# Altium PCB Dual_Holding_Dongle_1_sided.PcbDoc
Units mil, origin at the board's own origin, x right, y up, seen from the top; angles counter-clockwise.
Board outline 826.77 x 1181.1 mil, 2 copper layers (Top Layer, Bottom Layer), stack 61.811 mil thick; 49 components, 36 nets, 196 pads, 133 vias.
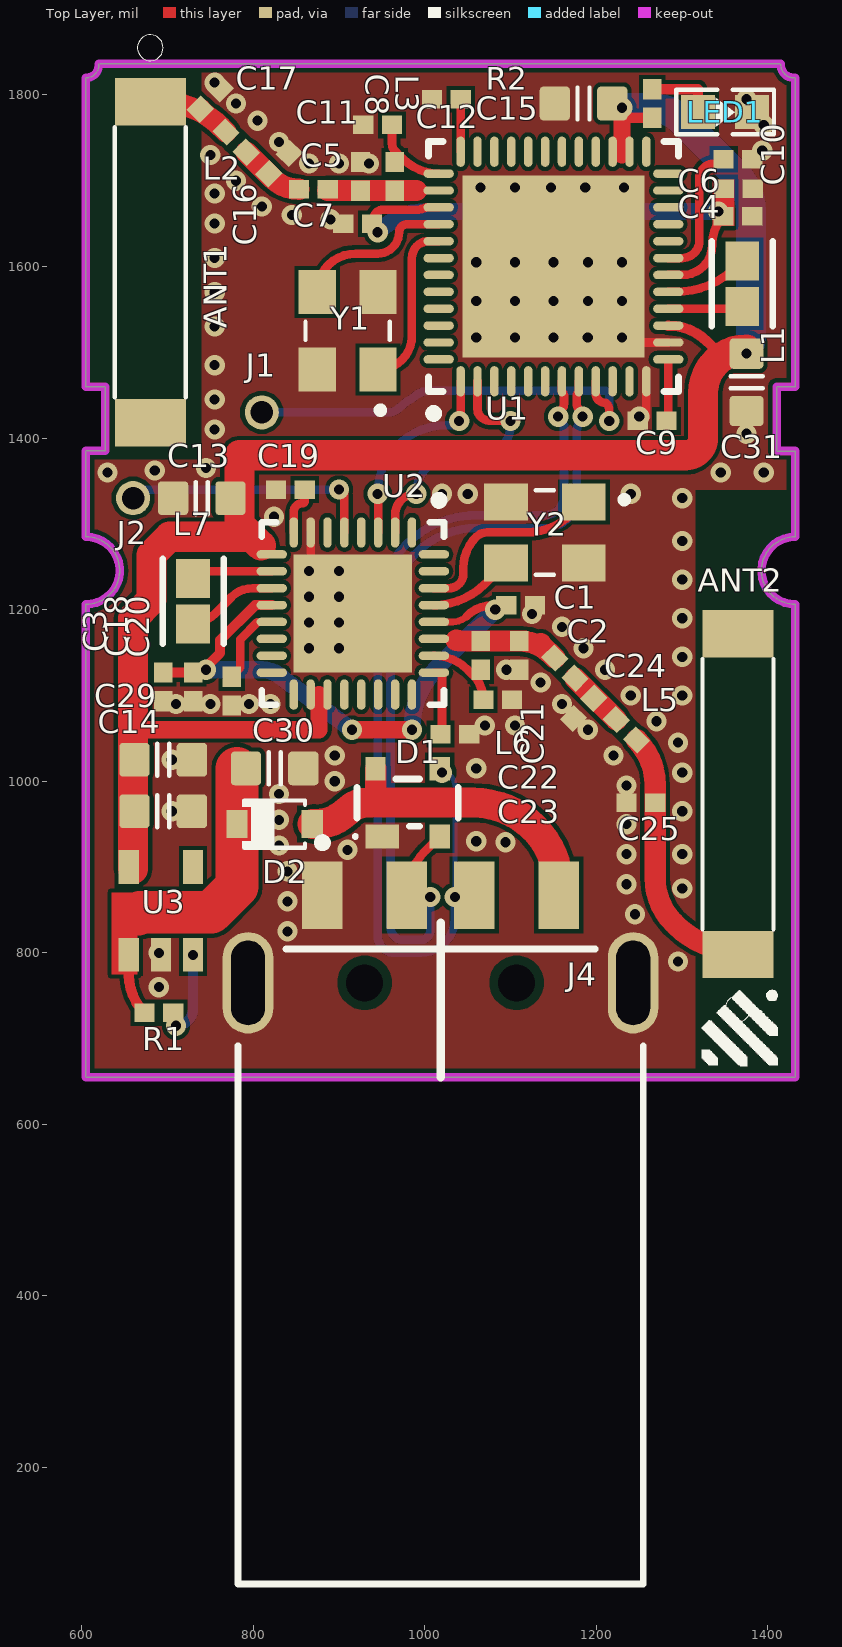
[diagram p0: Top Layer view]
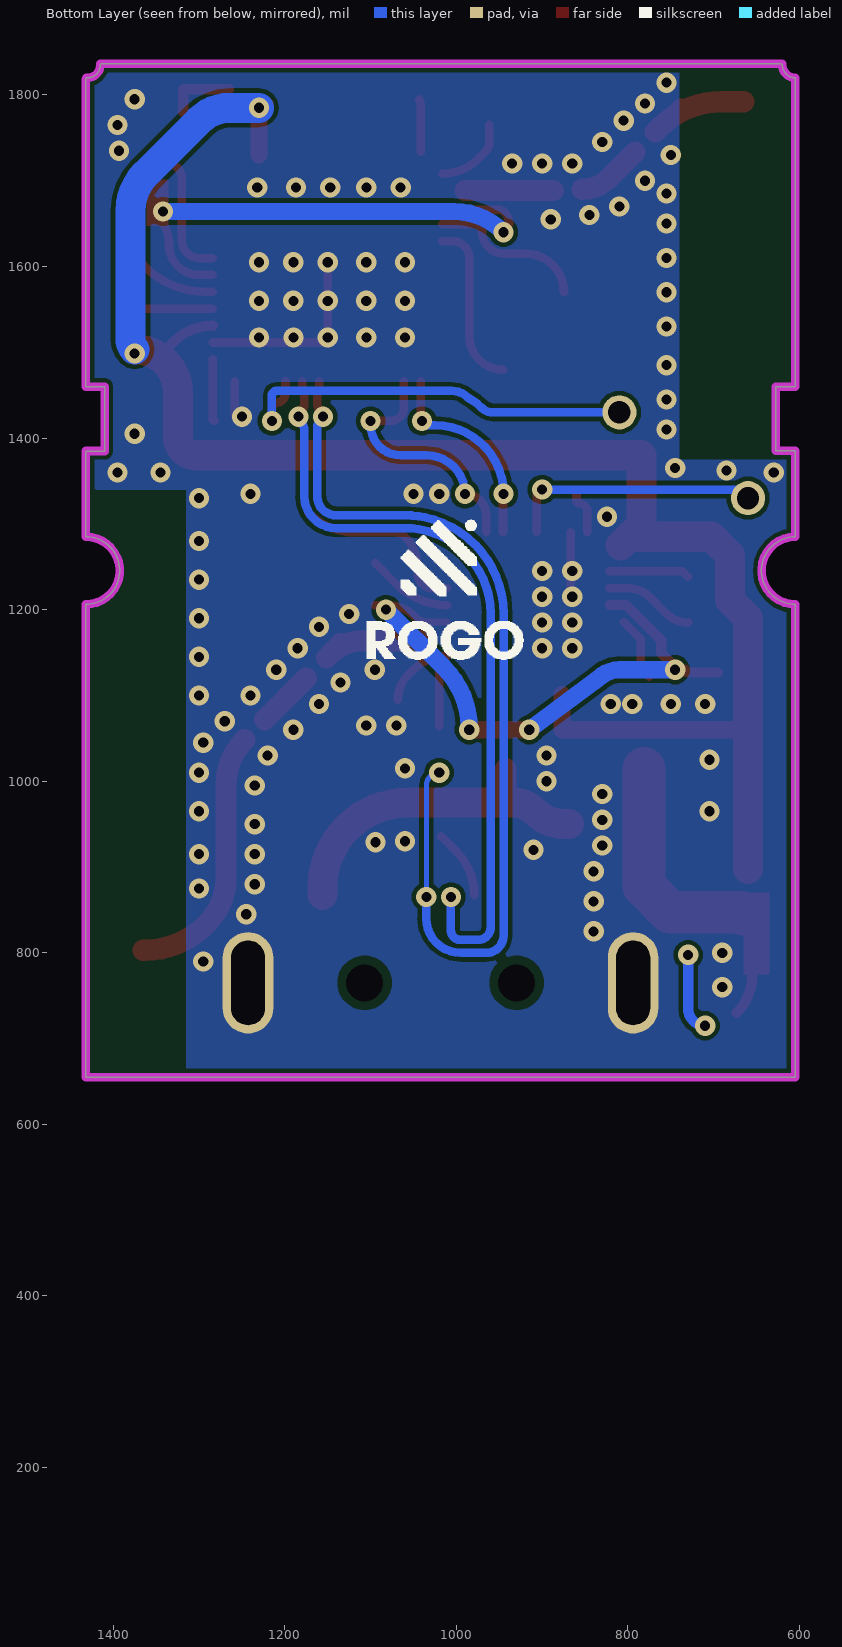
[diagram p1: Bottom Layer view, seen from below]
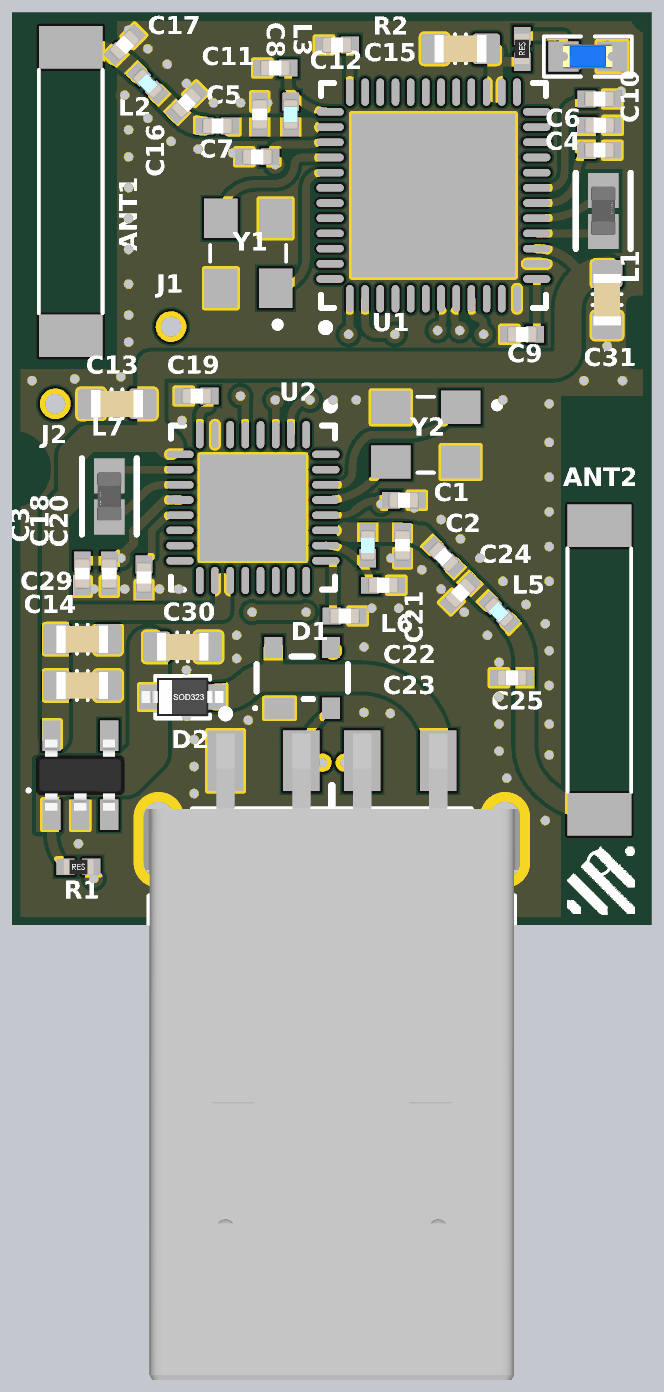
[diagram p2: 3D render of the assembled board from above, using the file's embedded part models]

## Layer stack, top to bottom
Top Solder: solder mask 0.5, Solder Resist, Dk 3.8
Top Layer: signal copper 1.378
Dielectric: core 59.0551, FR-4, Dk 4.5
Bottom Layer: signal copper 1.378
Bottom Solder: solder mask 0.5, Solder Resist, Dk 3.8

## Board outline
605,655 605,1206.18 ccw(c605,1245.55) 605,1284.92 605,1385 627.5,1385 627.5,1460 605,1460 605,1820 ccw(c605,1835) 619.97,1836.02 621.1,1836.1 1413.9,1836.1 1415.04,1836.02 ccw(c1430,1835) 1431.58,1820.08 1431.77,1818.23 1431.77,1459.92 1410,1459.92 1410,1384.92 1431.77,1384.92 1431.77,1284.92 ccw(c1431.77,1245.55) 1431.77,1206.18 1431.77,655

## Design rules (kind name [scope] priority, off if disabled: settings)
BoardOutlineClearance [All] p1: gap=7.87 ignorepadtopadclearanceinfootprint=FALSE
Clearance [All] p1: gap=5 ignorepadtopadclearanceinfootprint=FALSE except(9.84: Arc-Hole Track-Hole SMDPad-Hole THPad-Hole Via-Hole Fill-Hole Poly-Hole Region-Hole Text-Hole)
ComponentClearance [All] p1: gap=5 collisioncheckmode=3 verticalgap=5 showdistances=TRUE
DiffPairsRouting [All] p1: maxlimit=10 minlimit=5 mostfreqgap=5 toplayer_minwidth=5 toplayer_maxwidth=1000 toplayer_prefwidth=5 bottomlayer_minwidth=5 bottomlayer_maxwidth=1000 bottomlayer_prefwidth=5 maxuncoupledlength=500
Height [All] p1: minheight=0 maxheight=71497.94 prefheight=500
HoleSize [All] p1: absolutevalues=TRUE maxlimit=248.03 minlimit=11.81 maxpercent=80.000 minpercent=20.000
HoleToHoleClearance [All] p1: gap=9.84 allowstackedmicrovias=FALSE
MinimumAnnularRing [All] p1: minimumring=3
MinimumSolderMaskSliver [All] p1: minsoldermaskwidth=0
PlaneClearance [All] p1: clearance=5
PlaneConnect PlaneConnectPowerPads [InPadClass('PowerPads')] p1: planeconnectstyle=Direct reliefexpansion=20 reliefentries=4 reliefconductorwidth=10 reliefairgap=10
PlaneConnect [All] p2: pad.planeconnectstyle=Relief pad.reliefexpansion=11.81 pad.reliefentries=4 pad.reliefconductorwidth=5 pad.reliefairgap=5 via.planeconnectstyle=Direct via.reliefexpansion=11.81 via.reliefentries=4 via.reliefconductorwidth=5 via.reliefairgap=5
PolygonConnect PolygonConnectPowerPads [All vs (InPadClass('PowerPads'))] p1: connectstyle=Direct reliefconductorwidth=10 reliefentries=4 polygonreliefangle="90 Angle" airgapwidth=10
PolygonConnect [All] p2: connectstyle=Direct reliefconductorwidth=5 reliefentries=4 polygonreliefangle="90 Angle" airgapwidth=5
RoutingVias [All] p1: holewidth=11.81 width=23.62 viastyle="Through Hole" minholewidth=11.81 minwidth=23.62 maxholewidth=23.62 maxwidth=259.84
SilkToSilkClearance [All] p1: silktosilkclearance=0
SilkToSolderMaskClearance [IsPad] p1: minsilkscreentomaskgap=5 clearancetoexposedcopper=TRUE
SolderMaskExpansion [All] p1: expansion=2.95 istentingtop=FALSE
Width RF [InNetClass('RF')] p1: maxlimit=24.88 minlimit=24.88 preferedwidth=24.88 impedanceprofiledriven=TRUE impedanceprofileid={C07CD429-3416-41F3-9311-E252DA83A641} impedanceprofilevalue=50.000000 minimp=50.000000 maximp=50.000000 favimp=50.000000
Width [All] p2: maxlimit=1000 minlimit=5 preferedwidth=5 minimp=50.000000 maximp=50.000000 favimp=50.000000
20 further rules are at their usual default settings.

## Classes and differential pairs
net class RF: NetANT1_1 NetANT2_1 NetC2_1 NetC2_2 NetC5_1 NetC5_2
differential pair D: +D_P -D_N

## Components (designator, comment, footprint, x,y, rotation, side; value= is the part's Value field where it differs from the comment)
ANT1 "ANT_Rainsun" ANT2-SMD-9.5X2.1X1.0MM 680,1605 r270 top
ANT2 "ANT_Rainsun" ANT2-SMD-9.5X2.1X1.0MM 1365,985 r90 top
C1 "2.2uF" CAP0402 1111.73,1205 r0 top
C2 "220pF" CAP0402 1163.17,1131.83 r315 top
C3 "104" CAP0402 695,1110 r270 top
C4 "2.2uF" CAP0402 1365,1658.69 r0 top
C5 "220pF" CAP0402 870,1690 r180 top
C6 "104" CAP0402 1365.41,1690.87 r0 top
C7 "2.2uF" CAP0402 921.73,1650 r180 top
C8 "2.7pF" CAP0402 925,1705 r90 top
C9 "1UF" CAP0402 1265,1420 r180 top
C10 "1UF" CAP0402 1365,1725 r0 top
C11 "18pF" CAP0402 945,1765 r0 top
C12 "1UF" CAP0402 1025,1795 r180 top
C13 "1UF" CAPC1608X90N 740,1330 r180 top
C14 "1UF" CAPC1608X90N 695,965 r0 top
C15 "1UF" CAPC1608X90N 1185,1790 r180 top
C16 "2pF" CAP0402 830,1720 r45 top
C17 "2pF" CAP0402 750,1795 r45 top
C18 "2.2uF" CAP0402 730,1110 r270 top
C19 "1UF" CAP0402 843.27,1340 r180 top
C20 "1UF" CAP0402 775,1105 r270 top
C21 "2.7pF" CAP0402 1110,1146.73 r270 top
C22 "18pF" CAP0402 1085,1095 r180 top
C23 "1UF" CAP0402 1035,1055 r0 top
C24 "2pF" CAP0402 1185,1085 r225 top
C25 "2pF" CAP0402 1251.73,975 r180 top
C29 "10uF" CAPC1608X90N 695,1025 r0 top
C30 "10uF" CAPC1608X90N 825,1015 r0 top
C31 "10uF" CAPC1608X90N 1375,1465 r270 top
D1 "PRTR5V0U2X,215" NXP-SOT143B-4_V 980,975 r90 top
D2 "1N5819/SS14/S4(SOD_323)" SMT_DIODE_SOD_323 825,950 r180 top
J1 "TEST_POINT" TEST_POINT_HOLE_SMALL 810,1430 r0 top
J2 "TEST_POINT" TEST_POINT_HOLE_SMALL 660,1330 r90 top
J4 "480-37-1000" MOLX-480-37-1000_V 1018.39,816.18 r0 top locked
L1 "LBMF1608T470M" FP-LBMF1608-0_8-0_2-IPC_B 1370,1580 r90 top
L2 "3.3nH" IND0402 780,1745 r135 top value="150 mH"
L3 "1.3nF" IND0402 965,1705 r270 top value="150 mH"
L5 "3.3nH" IND0402 1235,1060 r315 top value="150 mH"
L6 "1.3nF" IND0402 1065,1146.73 r90 top value="150 mH"
L7 "LBMF1608T470M" FP-LBMF1608-0_8-0_2-IPC_B 730,1210 r270 top
LED1 "BLUE" SMT_LED_0603 1350,1780 r0 top
R1 "Resistor" RES0402 690,730 r0 top value=100K
R2 "Resistor" RES0402 1265,1790 r90 top value=100K
U1 "Telink TLSR8251F512ET48" QFN50P700X700X80_HS-49N 1150,1600 r90 top locked
U2 "Telink TLSR8251F512ET32" QFN50P500X500X80_HS-33N2 916.1,1195.51 r270 top
U3 "AP2112K-3.3TRG1" SOT23-5 692.4,797.64 r0 top
Y1 "ECS-240-10-33-AGM-TR" XTAL_ECS-240-10-33-AGM-TR 910,1525 r90 top
Y2 "ECS-240-10-33-AGM-TR" XTAL_ECS-240-10-33-AGM-TR 1140,1290 r180 top

## Footprints (in the part's own frame and the unit in brackets; to place one, negate y for a bottom-side part, rotate by r counter-clockwise, add the part's x,y. Pads: shape width x height; smd on the part's side, far side on the other; paste and mask are expansions set on the pad)
ANT2-SMD-9.5X2.1X1.0MM [mm]
  rect 1.4x2.1 smd: 1(-4.75,0) 2(4.75,0)
  silkscreen extent -6.73,-1.05 4,1.05
CAP0402 [mm] "0402 foorprint SMT"
  rect 0.6x0.55 smd: 1(-0.425,0) 2(0.425,0)
  body extent -0.5,-0.26 0.5,0.26, height 0.57
CAPC1608X90N [mm] "Chip Capacitor, Body 1.6x0.8mm, EIA 0603, IPC Medium Density"
  round 0.254 on Mech15: 0(0,0)
  rrect25% 0.9x1 smd: 1(-0.85,0) 2(0.85,0)
  silkscreen extent -0.18,-0.48 0.18,0.48, body extent -0.85,-0.45 0.85,0.45, height 0.89
FP-LBMF1608-0_8-0_2-IPC_B [mil]
  rect 45.48x39.61 smd paste+0 mask+0: 1(-26.59,0) 2(26.59,0)
  silkscreen extent -49,-36 49,36, body extent -59,-30 59,30, height 10
IND0402 [mm] "0402 foorprint SMT"
  rect 0.6x0.55 smd: 1(-0.425,0) 2(0.425,0)
  body extent -0.5,-0.25 0.5,0.25, height 0.5
MOLX-480-37-1000_V [mm] "CONN, 4-Leads, Body 12x18.8mm"
  rect 1.2x2 smd: 1(-3.5,1.3) 2(-1,1.3) 3(1,1.3) 4(3.5,1.3)
  oval 1.5x3 hole 1 slot 2.5 at 90 deg: 5(-5.7,-1.3) 6(5.7,-1.3)
  round 0.5 hole 1.1 unplated: MH1(-2.25,-1.3) MH2(2.25,-1.3)
  silkscreen extent -6,-19.1 6,2.97, body extent -6.35,-19.08 6.35,2.2, height 3.07
NXP-SOT143B-4_V [mm] "SOT143, 4-Leads, Body 3x1.4mm"
  rect 0.7x1 smd: 1(-1,0.75)
  rect 0.7x0.6 smd: 2(-1,-0.95) 3(1,-0.95) 4(1,0.95)
  silkscreen extent -1.05,-1.5 0.7,1.6, body extent -0.7,-1.5 0.7,1.5, height 1.1
QFN50P500X500X80_HS-33N2 [mm] "QFN, 32-Leads, Body 5.00x5.00mm, Pitch 0.50mm, Thermal Pad 3.50x3.50mm, IPC Medium Density"
  oval 0.9x0.25 smd: 1(-2.4,1.75) 2(-2.4,1.25) 3(-2.4,0.75) 4(-2.4,0.25) 5(-2.4,-0.25) 6(-2.4,-0.75) 7(-2.4,-1.25) 8(-2.4,-1.75) 17(2.4,-1.75) 18(2.4,-1.25) 19(2.4,-0.75) 20(2.4,-0.25) 21(2.4,0.25) 22(2.4,0.75) 23(2.4,1.25) 24(2.4,1.75)
  oval 0.25x0.9 smd: 9(-1.75,-2.4) 10(-1.25,-2.4) 11(-0.75,-2.4) 12(-0.25,-2.4) 13(0.25,-2.4) 14(0.75,-2.4) 15(1.25,-2.4) 16(1.75,-2.4) 25(1.75,2.4) 26(1.25,2.4) 27(0.75,2.4) 28(0.25,2.4) 29(-0.25,2.4) 30(-0.75,2.4) 31(-1.25,2.4) 32(-1.75,2.4)
  rect 3.5x3.5 smd: 33(0,0)
  silkscreen extent -3.47,-2.7 2.7,2.7, body extent -2.55,-2.55 2.55,2.55, height 0.8
QFN50P700X700X80_HS-49N [mm] "QFN, 48-Leads, Body 7.00x7.00mm, Pitch 0.50mm, Thermal Pad 5.40x5.40mm, IPC Medium Density"
  oval 0.9x0.25 smd: 1(-3.4,2.75) 2(-3.4,2.25) 3(-3.4,1.75) 4(-3.4,1.25) 5(-3.4,0.75) 6(-3.4,0.25) 7(-3.4,-0.25) 8(-3.4,-0.75) 9(-3.4,-1.25) 10(-3.4,-1.75) 11(-3.4,-2.25) 12(-3.4,-2.75) 25(3.4,-2.75) 26(3.4,-2.25) 27(3.4,-1.75) 28(3.4,-1.25) 29(3.4,-0.75) 30(3.4,-0.25) 31(3.4,0.25) 32(3.4,0.75) 33(3.4,1.25) 34(3.4,1.75) 35(3.4,2.25) 36(3.4,2.75)
  oval 0.25x0.9 smd: 13(-2.75,-3.4) 14(-2.25,-3.4) 15(-1.75,-3.4) 16(-1.25,-3.4) 17(-0.75,-3.4) 18(-0.25,-3.4) 19(0.25,-3.4) 20(0.75,-3.4) 21(1.25,-3.4) 22(1.75,-3.4) 23(2.25,-3.4) 24(2.75,-3.4) 37(2.75,3.4) 38(2.25,3.4) 39(1.75,3.4) 40(1.25,3.4) 41(0.75,3.4) 42(0.25,3.4) 43(-0.25,3.4) 44(-0.75,3.4) 45(-1.25,3.4) 46(-1.75,3.4) 47(-2.25,3.4) 48(-2.75,3.4)
  rect 5.4x5.4 smd: 49(0,0)
  silkscreen extent -4.47,-3.7 3.7,3.7, body extent -3.55,-3.55 3.55,3.55, height 0.8
RES0402 [mm] "0402 foorprint SMT"
  rect 0.6x0.55 smd: 1(-0.425,0) 2(0.425,0)
  body extent -0.5,-0.25 0.5,0.25, height 0.3
SMT_DIODE_SOD_323 [mm]
  rect 0.63x0.83 smd: 1(-1.115,0) 2(1.115,0)
  silkscreen extent -0.9,-0.7 0.96,0.7, body extent -1.35,-0.62 1.35,0.62, height 1.1
SMT_LED_0603 [mm]
  rect 1x1 smd: 1(-0.8,0) 2(0.8,0)
  silkscreen extent -1.45,-0.66 1.45,0.66, body extent -0.81,-0.4 0.81,0.4, height 0.6
SOT23-5 [mm] "SOT143-4 as used in SP0503BAHTG"
  round 0.2 on Top Overlay: 1(-1.7,0.8)
  rect 0.6x1 smd: 1(-0.95,0) 2(0,0) 3(0.95,0) 4(0.95,2.6) 5(-0.95,2.6)
  body extent -1.46,0.13 1.46,2.47, height 1
TEST_POINT_HOLE_SMALL [mm]
  round 1.01 hole 0.66: 1(0,0)
XTAL_ECS-240-10-33-AGM-TR [mm]
  rect 1.3x1.1 smd: 1(-1.15,-0.9) 2(1.15,-0.9) 3(1.15,0.9) 4(-1.15,0.9)
  silkscreen extent -2.45,-1.25 0.27,1.25

## Part data
ANT1 ANT2: "318010004", Package="FakePackage u", Availability="No availability data", Check_prices=https://www.snapeda.com/parts/AN9520/RainSun/view-part/106325/?ref=eda, MF=RainSun, MP=AN9520, Price=None, SnapEDA_Link=https://www.snapeda.com/parts/AN9520/RainSun/view-part/106325/?ref=snap
C1 C2 C3 C4 C5 C6 C7 C8 C9 C10 C11 C12 C13 C14 C15 C16 C17 C18 C19 C20 C21 C22 C23 C24 C25 C29 C30 C31: library part "CAP C_0603", "Capacitor SMD Cer 470nF 10% 16V X7R 0603", Manufacturer 1="Murata Electronics North America", Manufacturer 2="TDK Corporation", Manufacturer 3="Taiyo Yuden", Manufacturer 4=Samsung, Manufacturer Part Number 1=GRM188R71C474KA88D, Manufacturer Part Number 2=C1608X7R1C474K, Manufacturer Part Number 3=EMK107B7474KA-T, Manufacturer Part Number 4=CL10B474KONE, Package / Case="0603 (1608 metric)", Ratings="16V; X7R", Supplier Part Number 1=490-3295-2-ND, Tolerance=±10%, ComponentLink1Description=http://psearch.murata.com/capacitor/product/GRM188R71C474KA88#.pdf, ComponentLink1URL=http://psearch.murata.com/capacitor/product/GRM188R71C474KA88#.pdf, ComponentLink2Description=http://product.tdk.com/capacitor/mlcc/en/documents/mlcc_commercial_general_en.pdf, ComponentLink2URL=http://product.tdk.com/capacitor/mlcc/en/documents/mlcc_commercial_general_en.pdf, ComponentLink3Description=http://www.yuden.co.jp/or/product/category/capacitor/EMK107B7474KA-T.pdf, ComponentLink3URL=http://www.yuden.co.jp/or/product/category/capacitor/EMK107B7474KA-T.pdf, Material=ceramic, SCDType=spec, Supplier 1=Digi-Key, Supplier 2=Digi-Key, Supplier 3=Digi-Key, Supplier Part Number 2=445-5192-2-ND, Supplier Part Number 3=587-1250-2-ND
D1: library part CMP-2000-05285-1, "Ultra Low Capacitance Double Rail-to-Rail ESD Protection Diode, 5.5 V, 1 pF, -40 to 85 degC, 4-Pin SOT143B, RoHS, Tape and Reel", Capacitance Value=16pF, ESD Protection Voltage=8KV@ContactDisc, Leakage Current=0.1uA, Manufacturer="NXP Semiconductors", Operating Temp Range=-40Cto85C, Operating Temperature Classification=Industrial, Operating Temperature Max Deg. C=85C, Operating Temperature Min Deg. C=-40C, Package / Case=SOT, Reverse Breakdown Voltage=6V, Reverse Stand-off Voltage=5.5V, Configuration=Quad, Datasheet URL=https://datasheet.ciiva.com/4479/prtr5v0u2x-102853-4479461.pdf, Datasheet Version="Rev. 02, 01/2008", Direction Type=Uni-Directional, Leakage Current (Max)=0.1uA, Manufacturer URL=http://www.nxp.com/, Mounting=SurfaceMount, Mounting Style=SurfaceMount, Number of Elements=1, Package Type=SOT, Packaging=TapeandReel, Pin Count=3+Tab, Polarity=Uni-Directional, Product Depth (mm)=1.4mm, Product Height (mm)=1mm, Product Length (mm)=3mm, Rad Hardened=No, Suppressor Type=DiodeArrays, Working Voltage=5.5V, Working Voltage (Max)=5.5V
D2: library part SMT_DIODE_SCHOTTKY_SOD_323, "Surface mount schottky diode SOD-323(0805) Package"
J4: library part CMP-1676-00005-1, "Universal Serial Bus (USB) Shielded I/O Plug, Type A, Right Angle Connector, 1.5 A, -20 to 85 degC, 4-Pin SMD, RoHS, Tray", Case Code (Imperial)=0603, Case Code (Metric)=1608, Max Operating Temperature="155 degC", Min Operating Temperature="-55 degC", Package Quantity=5000, Power Rating="100 mW", Resistance="1 mohm", Tolerance=1%, Voltage Rating="50 V", Case\Package=0603, ComponentLink1Description="Manufacturer URL", ComponentLink1URL=http://www.molex.com/, ComponentLink2Description=Datasheet, ComponentLink2URL=http://www.molex.com/pdm_docs/sd/480371000_sd.pdf, DatasheetVersion="Rev. D, 06/2004", Height="0.45 mm", Length="1.6 mm", Mount="Surface Mount", PackageDescription="4-Pin Surface Mount Device, Body 12 x 18.8 mm", PackageReference=480-37-1000, Packaging="Tape and Reel", Pins=2, REACH SVHC="No SVHC", RoHSCompliant=true, Voltage Rating (DC)="50 V", Width="0.8 mm"
L1 L7: library part CMP-14484-001230-1, "SMD Inductors 47uH ±20% 0.035A 3.25Ω 0603", Case/Package=0603, DC Current=35mA, DC Resistance (DCR)=3.25R, Inductance=47uH, Max Operating Temperature=105°C, Min Operating Temperature=-40°C, Self Resonant Frequency=11MHz, Test Frequency=2.52MHz, Tolerance=20%, Core Material=Ferrite, Depth=0.9mm, Halogen Free="Halogen Free", Lead Free="Lead Free", Length=1.7mm, Military Standard=Not, Packaging="Tape and Reel", Radiation Hardening=No, RoHS Compliant=Yes
L2 L3 L5 L6: library part Inductor, "Inductor"
LED1: library part SMT_LED_0603, "SMT LED"
R1 R2: library part RES-SM-0603-10K, "RES SM 0603 10K", Supplier Part Number 1=9330399, Supplier 1=Farnell, Supplier 2=Digi-Key, Supplier Part Number 2=541-10.0KHCT-ND
U3: "Linear Voltage Regulator IC 1 Output 600mA SOT-25", Package="SOT-753 Diodes Inc.", Digi-Key_Part_Number=AP2112K-3.3TRG1DICT-ND, Digi-Key_Purchase_URL=https://www.digikey.com.au/product-detail/en/diodes-incorporated/AP2112K-3.3TRG1/AP2112K-3.3TRG1DICT-ND/4505257?utm_source=snapeda&utm_medium=aggregator&utm_campaign=symbol, MF="Diodes Inc.", MP=AP2112K-3.3TRG1, SnapEDA_Link=https://www.snapeda.com/parts/AP2112K-3.3TRG1/Diodes%20Inc./view-part/454988/?ref=snap
Y1 Y2: Package=None, Availability=Unavailable, MP=ECS-240-10-33-AGM-TR, Price=None

## Via types
v1: diameter 23.62, hole 11.81, Top Layer to Bottom Layer, tented both sides, 130 vias
v2: diameter 23.62, hole 11.81, Top Layer to Bottom Layer, 3 vias

## Nets (pads, with @x,y where several pads share a name; then routed paths per layer and width w, separated by ;. In a path a pad name is that pad's centre, name@x,y a point inside that pad or via, vN(x,y) a via of type N, cw(c..) or ccw(c..) an arc to the next point about the centre after c; other vN are vias at no path point)
1.2V: C4.1 C6.1 C7.1 U1.18 U1.39 | length 603.5
  Top Layer w10: C7.1 939.39,1655.83 cw(c957.36,1650) 943.74,1663.1 cw(c950.92,1656.14) 950.88,1666.14 990,1666.14 ccw(c990,1688.58) 999.09,1668.07 cw(c1003.08,1658.9) 1003.04,1668.9 U1.39 ; U1.18 1300.16,1590.16 ccw(c1300.16,1625) 1335,1625 1335,1626.65 cw(c1380.3,1626.65) C4.1 C4.1@1348.27,1662.37
  Bottom Layer w20: v1(945,1640) cw(c1003.07,1581.93) 1003.07,1664.06 v1(1342.07,1664.06)
1.2V_B: C1.1 C3.1 C18.1 U2.12 U2.28 | length 708.9
  Top Layer w8: U2.28 1032.47,1185.67 ccw(c1032.47,1208.82) 1048.84,1192.44
  Top Layer w10: 1048.85,1192.45 cw(c1079.14,1162.15) 1079.14,1205 C1.1
  Top Layer w12: C3.1 C18.1 731.63,1128.37 743.37,1128.37 v1(745,1130) ; C18.1@733.91,1130 v1(745,1130) ; U2.12 802.18,1205.35 761.23,1164.41 761.23,1149.38 745,1133.14 v1(745,1130)
  Top Layer w20: v1(915,1060) v1(985,1060)
  Bottom Layer w20: v1(745,1130) 809.54,1130 cw(c809.54,1094.44) 826.32,1125.79 cw(c809.54,1094.44) 834.69,1119.58 v1(915,1060) ; v1(985,1060) 985,1061.51 cw(c1085,1061.51) 1014.29,1132.22 v1(1082.07,1200)
3.3V: C13.1 C14.1 C15.1 C29.1 C31.1 R2.1 U1.15 U1.26 U1.27 U2.9 U2.18 U2.19 U3.5 | length 2106.3
  Top Layer w12: C15.1 ccw(c1235.2,1790) 1230,1774.1 ccw(c1235.2,1790) 1235.2,1773.27 R2.1 ; U1.15 cw(c1283.86,1466.59) 1329.48,1512.21 1346.81,1494.87
  Top Layer w20: 660,1060 876.73,1060 876.73,1101.02 ; 1230,1730 C15.1@1230,1774.1
  Top Layer w35: U3.5@660,897.5 660,1060 660,1190 681.22,1211.22 681.22,1263.78 702.44,1285 796.39,1285 796.39,1286.96 ; 808.82,1274.53 796.39,1286.96 ; C31.1@1375,1503.46 ccw(c1375,1452.96) 1346.81,1494.87 ccw(c1375,1452.96) 1324.5,1452.96 1324.5,1400.5 cw(c1303.99,1400.5) 1303.99,1380 783.96,1380 783.96,1299.39 796.39,1286.96
  Bottom Layer w35: v1(1230,1785) 1263.79,1785 cw(c1263.79,1733.79) 1299.99,1770.01 1362.32,1707.68 cw(c1319.64,1665) 1380,1665 1380,1515.54 cw(c1362.93,1515.54) v1@1375,1503.46
  other v1: 1375,1498.46
D_N: D1.3 J4.3 U1.7 | length 1099.6
  Top Layer w10: v1(1155.37,1425) cw(c1164.27,1425) 1157.98,1431.29 1158.78,1432.1 ccw(c1150.56,1440.31) 1162.18,1440.31 1162.18,1449.5 ccw(c1158.19,1449.5) 1161.01,1452.33 cw(c1163.84,1455.16) 1159.84,1455.16 U1.7
  Bottom Layer w6: v2(1020,1010) cw(c1020,994.99) 1035.02,994.99 v2(1035.02,865)
  Bottom Layer w10: v2(1035.02,865) 1035.02,840.01 cw(c995,840.01) 995,800 965,800 cw(c965,820) 945,820 945,1195 cw(c1060,1195) 1036.32,1307.54 cw(c1060,1195) 1060,1310 1140,1310 ccw(c1140,1332.18) 1162.18,1332.18 1162.18,1414.77
D_P: D1.2 J4.2 U1.8 | length 980
  Top Layer w10: J4.2 cw(c1051.16,867.36) 1000.15,918.37 D1.2 ; U1.8 1179.53,1455.16 cw(c1175.53,1455.16) 1178.36,1452.33 ccw(c1181.18,1449.5) 1177.18,1449.5 1177.18,1440.31 ccw(c1188.81,1440.31) 1180.59,1432.1 1181.39,1431.29 cw(c1175.1,1425) v1(1184,1425)
  Bottom Layer w10: v2(1006.39,865) 1006.39,826.39 cw(c995,826.39) 995,815 975,815 cw(c975,830) 960,830 960,1195 cw(c1060,1195) 1043.66,1293.66 cw(c1060,1195) 1060,1295 1140,1295 ccw(c1140,1332.18) 1177.18,1332.18 1177.18,1408.56 cw(c1191.54,1408.56) 1181.39,1418.71 ccw(c1175.1,1425) v1(1184,1425)
GND: C1.2 C3.2 C4.2 C6.2 C7.2 C8.2 C9.2 C10.2 C11.1 C12.2 C13.2 C14.2 C15.2 C16.2 C17.2 C18.2 C19.2 C20.2 C21.2 C22.1 C23.2 C24.2 C25.2 C29.2 C30.2 C31.2 D1.1 J4.1 J4.5 J4.6 LED1.2 U1.12 U1.14 U1.49 U2.7 U2.33 U3.2 Y1.2 Y1.4 Y2.2 Y2.4 | length 347.9
  Top Layer w10: v1(865,1215) ccw(c865,1216.89) 866.89,1216.89 U2.7 ; U1.49 1150,1511.42 U1.14 ; v1(1250,1425) 1258.27,1425 U1.12
  other v1: 690,760 1295,790 690,800 840,825 1245,845 840,860 1300,875 1235,880 840,895 1235,915 1300,915 910,920 830,925 1094.17,928.82 1060,930 1235,950 830,955 705,965 1300,965 830,985 1235,995 895,1000 1300,1010 1060,1015 705,1025 895,1030 1220,1030 1295,1045 1190,1060 1070,1065 1105,1065 1270,1070 710,1090 750,1090 795,1090 820,1090 1160,1090 1240,1100 1300,1100 1135,1115 1095,1130 1210,1130 1300,1145 865,1155 900,1155 1185,1155 1160,1180 865,1185 900,1185 1300,1190 1125,1195 900,1215 1300,1235 865,1245 900,1245 1300,1280 824.31,1308.27 1300,1330 1020,1335 1050,1335 1240,1335 630,1360 1345,1360 1395,1360 685.18,1362.23 745,1365 1375,1405 755,1410 755,1445 755,1485 1059.93,1517.12 1104.93,1517.12 1149.93,1517.12 1189.93,1517.12 1229.93,1517.12 755,1530 1060,1560 1105,1560 1150,1560 1190,1560 1230,1560 755,1570 1060,1605 1105,1605 1150,1605 1190,1605 1230,1605 755,1610 755,1650 890,1655 845,1660 810,1670 755,1685 1064.93,1692.12 1104.93,1692.12 1147.07,1692.02 1187.07,1692.02 1232.07,1692.02 780,1700 865,1720 900,1720 935,1720 750,1730 1393.27,1735 830,1745 1395,1765 805,1770 780,1790 1375,1795 755,1814.29
NetANT1_1: ANT1.1 C17.1 L2.2 | length 122.3
  Top Layer w24.88: ANT1.1@665,1792.01 691.57,1792.01 cw(c691.57,1692.01) C17.1@744.46,1776.88 ; C17.1 C17.1@744.46,1776.88 ; L2.2 762.28,1762.72 ccw(c691.57,1692.01) C17.1@744.46,1776.88
NetANT2_1: ANT2.1 C25.1 L5.2 | length 308.7
  Top Layer w24.88: L5.2@1246.86,1048.14 cw(c1194.6,995.94) 1268.46,995.94 C25.1 1268.46,886.99 ccw(c1341.99,886.99) 1290,835 1292.72,832.28 ccw(c1363.43,902.99) 1363.43,802.99 ANT2.1@1365,802.99
NetC2_1: C2.1 C21.1 L6.2 U2.27 | length 137.6
  Top Layer w24.88: 1036.5,1164.41 ccw(c1043.3,1188.35) 1043.23,1163.46 L6.2 C21.1 cw(c1110,1111.47) C2.1@1146.76,1148.24 ; 1134.93,1160.07 C2.1
NetC2_2: C2.2 C24.1 L5.1 | length 68.1
  Top Layer w24.88: C2.2 L5.1
NetC5_1: C5.1 C8.1 L3.2 U1.38 | length 103.3
  Top Layer w24.88: C5.1@886.73,1688.58 990,1688.58
NetC5_2: C5.2 C16.1 L2.1 | length 77.4
  Top Layer w24.88: L2.1 817.5,1707.5 822.08,1702.92 ccw(c853.27,1734.1) C5.2
NetC9_1: C9.1 U1.13 | length 72.9
  Top Layer w10: C9.1 ccw(c1281.73,1422.13) 1283.86,1422.13 U1.13
NetC10_1: C10.1 U1.19 | length 160.3
  Top Layer w10: U1.19 1299.84,1609.84 ccw(c1299.84,1630) 1320,1630 1320,1702.93 cw(c1337.07,1702.93) 1325,1715 cw(c1337.07,1702.93) 1337.07,1720 C10.1@1350,1720
NetC11_2: C11.2 L3.1 U1.37 | length 90.6
  Top Layer w10: C11.2 961.73,1742.89 ccw(c972.89,1742.89) 965,1735 971.14,1728.86 974.47,1725.53 ccw(c1016.14,1767.2) U1.37
NetC19_1: C19.1 U2.8 | length 57.3
  Top Layer w10: U2.8 847.2,1313.98 cw(c857.4,1313.98) 857.4,1324.17 ccw(c857.4,1326.77) 860,1326.77 C19.1
NetC20_1: C20.1 U2.13 | length 75.9
  Top Layer w10: C20.1 775,1122.72 785,1132.72 785,1165.55 U2.13@804.73,1185.27
NetC22_2: C22.2 L6.1 U2.26 | length 84.6
  Top Layer w10: U2.26 1010.65,1146.3 cw(c1010.65,1090.65) 1050,1130 1056.44,1123.56 cw(c1027.87,1095) C22.2
NetC30_1: C30.1 D2.2 R1.1 U3.1@655,797.64 | length 339.9
  Top Layer w12: U3.1@655,797.64 655,774.1 ccw(c717.37,774.1) R1.1
  Top Layer w50: 664.75,845 665.84,845 668.16,847.32 751.05,847.32 781.1,877.38 C30.1@781.1,1015
NetJ1_1: J1.1 U1.9 | length 499.5
  Top Layer w10: U1.9 1199.21,1452.33 ccw(c1210.59,1452.33) 1210.59,1440.95 cw(c1205,1432.66) 1215,1432.7 v1(1215,1420)
  Bottom Layer w10: J1.1 957.93,1430 ccw(c957.93,1447.07) 970,1435 cw(c1018.28,1386.72) 986.5,1447.15 cw(c1005.45,1428.2) 1005.45,1455 1210,1455 cw(c1210,1450) 1215,1450 v1(1215,1420)
NetJ2_1: J2.1 U2.5 | length 303.6
  Top Layer w10: v1(900,1340) cw(c900,1333.74) 906.26,1333.74 U2.5
  Bottom Layer w10: J2.1 660,1340 v1(900,1340)
NetL1_1: L1.1 U1.16 | length 86.8
  Top Layer w10: U1.16 1363.68,1550.79 ccw(c1363.68,1559.73) L1.1
NetL1_2: L1.2 U1.17 | length 96.8
  Top Layer w10: U1.17 1292.46,1570.47 ccw(c1292.46,1670.47) 1363.17,1599.76 L1.2
NetL7_1: L7.1 U2.10 | length 94.3
  Top Layer w10: L7.1@730,1238.19 736.54,1244.72 U2.10
NetL7_2: L7.2 U2.11 | length 105.2
  Top Layer w10: L7.2@730,1185 ccw(c730,1221.21) 755.61,1195.61 775,1215 cw(c799.24,1190.76) 799.24,1225.04 U2.11
NetLED1_1: LED1.1 R2.2 | length 80.2
  Top Layer w12: R2.2 1318.5,1806.73 LED1.1
NetR1_2: R1.2 U3.3 | length 105.9
  Top Layer w12: U3.3@729.8,785.7 v1(729.8,797.64)
  Bottom Layer w12: v1(710,715) ccw(c710,734.8) 729.8,734.8 v1(729.8,797.64)
RST_A: C12.1 U1.36 | length 61.3
  Top Layer w10: U1.36 1041.73,1789.17 C12.1@1043.27,1795
RST_B: C23.1 U2.25 | length 71.6
  Top Layer w10: U2.25 1019.92,1126.61 1020,1126.54 C23.1@1020,1064.42
RXD: U1.2 U2.2 | length 298.2
  Top Layer w10: U2.2 965.32,1310.32 cw(c990,1310.32) v1(990,1335) ; U1.2 1061.42,1433.65 ccw(c1073.65,1433.65) 1065,1425 ccw(c1077.07,1437.07) 1077.07,1420 v1(1100,1420)
  Bottom Layer w10: v1(990,1335) cw(c1035,1335) 1035,1380 1065,1380 ccw(c1065,1415) 1100,1415 v1(1100,1420)
TXD: U1.1 U2.3 | length 236.3
  Top Layer w10: v1(945,1335) 945.63,1335 U2.3 ; v1(1040,1420) ccw(c1040,1421.73) 1041.73,1421.73 U1.1
  Bottom Layer w10: v1(945,1335) cw(c1025,1335) 1025,1415 1035,1415 ccw(c1035,1420) v1(1040,1420)
VBUS: D1.4 D2.1 J4.4 | length 393.3
  Top Layer w25: 942.6,980 D1.4
  Top Layer w35: D2.1 872.83,950 ccw(c872.83,1001.21) 909.04,965 cw(c933.18,940.86) 933.18,975 1056.51,975 cw(c1056.51,875) 1127.22,945.71 cw(c1057.29,875.78) 1156.18,875.78 J4.4
XC1_A: U1.40 Y1.3 | length 186.6
  Top Layer w10: Y1.3 cw(c919.29,1570.28) 919.29,1615 945,1615 ccw(c945,1640) 970,1640 cw(c979.21,1640) 979.21,1649.21 U1.40
XC1_B: U2.29 Y2.3 | length 104.4
  Top Layer w10: U2.29@1014.09,1205.35 U2.29 ccw(c1010.59,1289.66) 1070.2,1230.05 Y2.3
XC2_A: U1.41 Y1.1 | length 195.1
  Top Layer w10: Y1.1 ccw(c945.43,1519.29) 985,1519.29 985,1610 cw(c1004.53,1610) 1004.53,1629.53 U1.41
XC2_B: U2.30 Y2.1 | length 211.4
  Top Layer w10: U2.30 1028.02,1225.04 ccw(c1028.02,1241.98) 1040,1230 ccw(c1027.93,1242.07) 1045,1242.07 1045,1248.79 cw(c1096.21,1248.79) 1059.99,1284.99 cw(c1072.08,1272.9) 1060.08,1285.08 cw(c1072.08,1272.9) 1072.08,1290 1117.37,1290 ccw(c1117.37,1368.4) Y2.1@1172.81,1312.96
pads on no net: ANT1.2 ANT2.2 C13.0 C14.0 C15.0 C29.0 C30.0 C31.0 J4.MH1 J4.MH2 U1.3 U1.4 U1.5 U1.6 U1.10 U1.11 U1.20 U1.21 U1.22 U1.23 U1.24 U1.25 U1.28 U1.29 U1.30 U1.31 U1.32 U1.33 U1.34 U1.35 U1.42 U1.43 U1.44 U1.45 U1.46 U1.47 U1.48 U2.1 U2.4 U2.6 U2.14 U2.15 U2.16 U2.17 U2.20 U2.21 U2.22 U2.23 U2.24 U2.31 U2.32 U3.1@625.47,829.13 U3.4

## Polygon pours and split planes (outlines as drawn)
GND on Bottom Layer "GND_L02_P001" (solid, pour order 1): 612.5,1835 1432.5,1835 1432.5,667.07 ccw(c1449.57,667.07) 1437.5,655 612.5,655
GND on Top Layer "GND_L01_P000" (solid, pour order 0): 605,1835 1425,1835 1425,667.07 ccw(c1442.07,667.07) 1430,655 605,655

## Keep-outs
Keep-Out Layer:
  lines w10: 605,1284.92 cw(c605,1245.55) 605,1206.18 605,655 1431.77,655 1431.77,1206.18 cw(c1431.77,1245.55) 1431.77,1284.92 1431.77,1384.92 1410,1384.92 1410,1459.92 1431.77,1459.92 1431.77,1818.23 ; 605,1285 605,1385 627.5,1385 627.5,1460 605,1460 605,1480 605,1820 ccw(c605,1835) 619.96,1836.02 ; 621.1,1836.1 1413.9,1836.1 ; 1415.04,1836.02 ccw(c1430,1835) 1431.58,1820.08

## Other copper
Top Layer:
  region net 1.2V: 1335.77,1701.31 1335.77,1647.29 1360.77,1647.29 1360.77,1701.31
  pour cut-out: 1430,1335 1430,1340 1315,1340 1315,660.54 1426.3,660.54
  pour cut-out: 740,1835 740,1375 605,1375 605,1835
  region net NetC30_1: 665,870 665,775 635,775 635,870
Bottom Layer:
  pour cut-out: 1430,1330 1420,1340 1315,1340 1315,655.54 1426.3,655.54
  pour cut-out: 740,1835 740,1375 605,1375 605,1835

## Silkscreen, mask and mechanical layers (free items; w line width, h text height)
Top Overlay:
  drawing of 6 lines, arcs and shapes, not listed
Bottom Overlay:
  drawing of 9 lines, arcs and shapes, not listed

## Text inside footprints (layer, text, board x,y; h text height)
J4: Mechanical 1 "PCB EDGE" at 1068.39,665 h46